# EAGLE board SchCompleto (EAGLE 9.6.2)
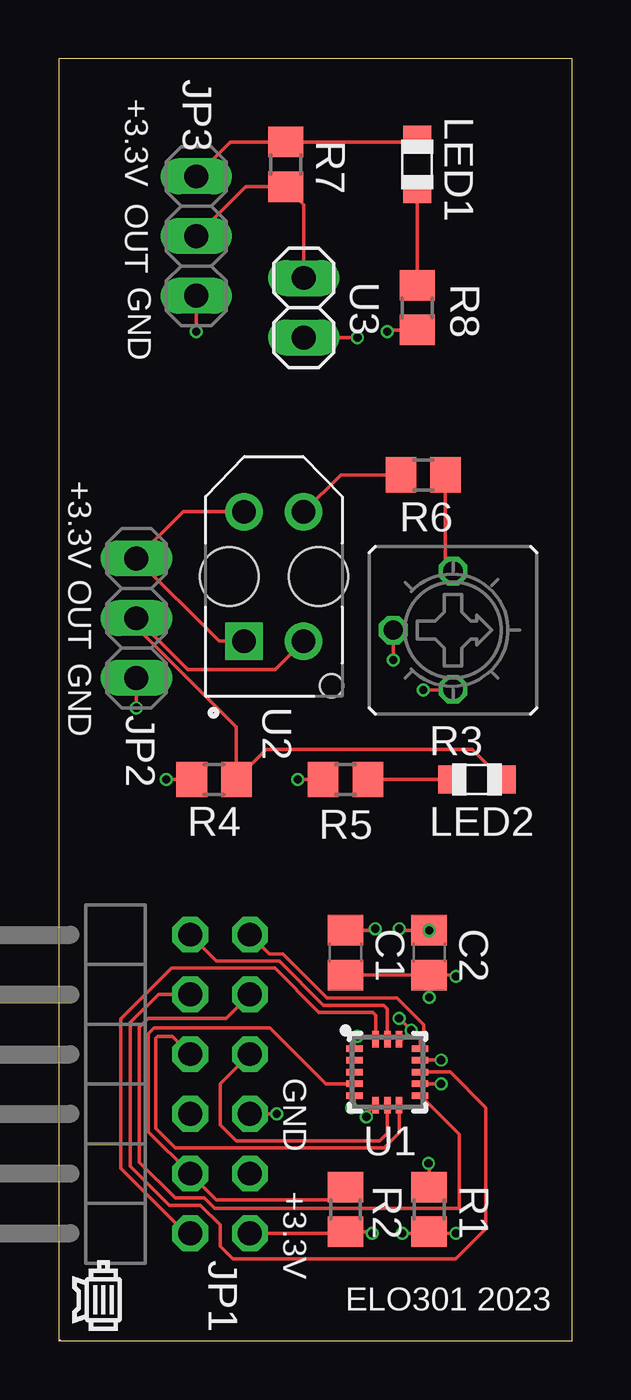
[diagram p0: board, top side]
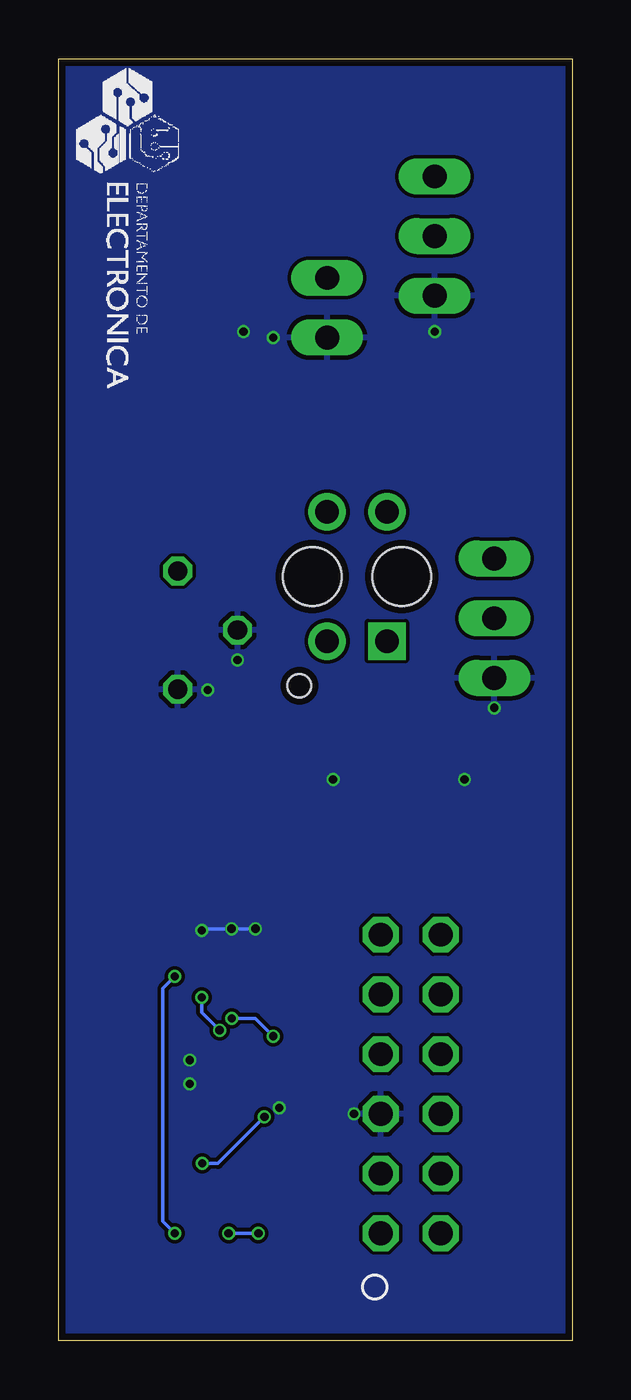
[diagram p1: board, bottom side, seen from below]

Size 21.82 x 54.53 mm. Coordinates in mm from the lower left corner, seen from the top.
Outline: 0,0 21.82,0 21.82,54.53 0,54.53 0,0
Copper layers (1*16): Top 0.035mm / dielectric 1.5mm / Bottom 0.035mm
Design rules "PCBWay_2L_152um-Track *": minimum track width 6mil, minimum drill 0.3mm, track to track 6mil, track to pad 6mil, pad to pad 6mil, via to via 6mil, smd to smd 0mil, copper to edge 0.3mm, drill to drill 10mil, minimum pad ring 6mil, minimum via ring 0.1mm, stop-mask expansion 2mil, vias tented up to drill 0.45mm, thermal gap 0.2mm

## Footprints (pad centres in the part's own frame; a part is rotated, then mirrored left to right if it is on the bottom)
C0805 = smd 1.3 x 1.5: 1 -0.95,0; 2 0.95,0
2X06/90 = drill 1.016 octagon: 1 -6.35,-6.35; 2 -6.35,-3.81; 3 -3.81,-6.35; 4 -3.81,-3.81; 5 -1.27,-6.35; 6 -1.27,-3.81; 7 1.27,-6.35; 8 1.27,-3.81; 9 3.81,-6.35; 10 3.81,-3.81; 11 6.35,-6.35; 12 6.35,-3.81
1X03 = drill 1.016 long: 1 -2.54,0; 2 0,0; 3 2.54,0
CHIP-LED0805 = smd 1.2 x 1.2: A 0,-1.05; C 0,1.05
R0805 = smd 1.3 x 1.5: 1 -0.95,0; 2 0.95,0
CT6 = drill 0.813 octagon: A 2.515,0; E -2.515,0; S 0,-2.54
LGA-16-3X3 = smd 0.7 x 0.28: 1 -1.4,1; 2 -1.4,0.5; 3 -1.4,0; 4 -1.4,-0.5; 5 -1.4,-1; 9 1.4,-1; 10 1.4,-0.5; 11 1.4,0; 12 1.4,0.5; 13 1.4,1 | smd 0.28 x 0.7: 6 -0.5,-1.4; 7 0,-1.4; 8 0.5,-1.4; 14 0.5,1.4; 15 0,1.4; 16 -0.5,1.4
PCBMOUNT = drill 1 pad 1.6 square: 1 -2.75,1.27 | drill 1 pad 1.6: 2 -2.75,-1.27; 3 2.75,-1.27; 4 2.75,1.27 | hole 2.5: 0,1.9; 0,-1.9 | hole 1: -4.65,-2.45
1X02 = drill 1.016 long: 1 -1.27,0; 2 1.27,0

## Placement (x,y rotation side)
C1  100nF  [C0805]  12.19,16.51 90 top
C2  10uF  [C0805]  15.75,16.51 90 top
JP1  [2X06/90]  1.78,10.92 90 top
JP2  [1X03]  3.3,30.73 90 top
JP3  [1X03]  5.84,46.99 90 top
LED1  [CHIP-LED0805]  15.24,50.04 180 top
LED2  [CHIP-LED0805]  17.78,23.88 90 top
R1  10k  [R0805]  15.75,5.59 270 top
R2  10k  [R0805]  12.19,5.59 270 top
R3  5kΩ  [CT6]  16.76,30.23 270 top
R4  3.3kΩ  [R0805]  6.6,23.88 0 top
R5  100Ω  [R0805]  12.19,23.88 0 top
R6  50Ω  [R0805]  15.49,36.83 180 top
R7  3.3kΩ  [R0805]  9.65,50.04 270 top
R8  100Ω  [R0805]  15.24,43.94 270 top
U1  LIS3DHTR  [LGA-16-3X3]  13.97,11.43 0 top
U2  TCRT5000L  [PCBMOUNT]  9.14,32.51 90 top
U3  SENSOR_TEMPERATURA  [1X02]  10.41,43.94 270 top

## Library data of the parts
C1 = rcl; PARTNO: GCM21BR72A104KA37L; SPICEPREFIX: C
C2 = rcl; PARTNO: EDK106M035A9BAA; SPICEPREFIX: C
JP1 = PPPC062LJBN-RC - Sullins Connector Solutions
JP2 JP3 = PPPC031LFBN-RC-Sullins; PARTNO: PPPC031LFBN-RC
LED1 LED2 = LED-EAST2012GA0; PARTNO: EAST2012GA0
R1 R2 = rcl; PARTNO: RC0805FR-0710KL; SPICEPREFIX: R
R3 = POTENCIOMETRO-CT-6EP502; PARTNO: CT-6EP502
R4 R7 = rcl; PARTNO: RC0402FR-073K3L; SPICEPREFIX: R
R5 R8 = rcl; PARTNO: RC0805FR-07100RL; SPICEPREFIX: R
R6 = rcl; PARTNO: RT0805FRE0751RL; SPICEPREFIX: R
U1 = LIS3DHTR-STM
U2 = TCRT5000L-Vishay; CHECK_PRICES: https://www.snapeda.com/parts/TCRT5000L/Vishay+Semiconductor+Opto+Division/view-part/?ref=eda; DESCRIPTION: Reflective Optical Sensor 0.591 (15mm) PCB Mount; MF: Vishay; MP: TCRT5000L; PACKAGE: PCB Mount Vishay Semiconductor; PURCHASE-URL: https://www.snapeda.com/api/url_track_click_mouser/?unipart_id=229608&manufacturer=Vishay&part_name=TCRT5000L&search_term=None; SNAPEDA_LINK: https://www.snapeda.com/parts/TCRT5000L/Vishay+Semiconductor+Opto+Division/view-part/?ref=snap
U3 = NTCLE305E4103SB - Vishay; PARTNO: NTCLE305E4103SB

## Nets
+3V3: C1.1 C2.1 JP1.1 R1.2 R2.2 U1.1 U1.14
ADC1: JP1.2 U1.16
ADC2: JP1.12 U1.15
ADC3: JP1.11 U1.13
CS: JP1.8 U1.8
GND: C1.2 C2.2 JP1.5 JP2.1 JP3.1 R3.A R3.S R4.1 R5.1 R8.2 U1.5 U1.10 U1.12 U3.2
INT1: JP1.10 U1.11
INT2: JP1.9 U1.9
LED1_R8: LED1.C R8.1
OUT2: JP2.2 LED2.A R4.2 U2.2
OUT3: JP3.2 R7.2 U3.1
R3_R6: R3.E R6.1
R5_LED2: LED2.C R5.2
R6_TCRT: R6.2 U2.3
SCL/SPC: JP1.4 R2.1 U1.4
SDA/SDI/SDO: R1.1 U1.6
SDO/SA0: JP1.7 U1.7
VCC: JP2.3 U2.1 U2.4
VDD: JP3.3 LED1.A R7.1

## Tracks (layer width: path | path; a pad name or v marks a point on that pad's centre or on a via)
+3V3  (via drill 0.35)
  Top 0.152: C2.1 C1.1 | JP1.1 12.13,4.57 R2.2 13.27,4.64 v13.34,4.57 | U1.1 12.57,12.82 v12.7,12.95 | U1.14 14.6,12.83 14.97,13.21 v14.99,13.21 14.98,13.21 v14.47,13.72 | v15.75,14.61 C2.1 | v14.61,4.57 15.68,4.57 R1.2 15.81,4.57 v16.89,4.57 | v16.89,15.49 16.82,15.56 C2.1 | C2.1
  Bottom 0.152: v12.7,12.95 13.46,13.72 v14.47,13.72 | v14.99,13.21 15.75,13.97 v15.75,14.61 | v13.34,4.57 v14.61,4.57 | v16.89,4.57 17.4,5.08 17.4,14.99 v16.89,15.49
ADC1
  Top 0.152: U1.16 13.47,13.84 13.34,13.97 11.06,13.97 9.17,15.85 4.8,15.85 2.64,13.7 2.64,7.34 5.41,4.57 JP1.2
ADC2
  Top 0.152: U1.15 13.97,14.11 13.81,14.27 11.26,14.27 9.37,16.15 6.7,16.15 JP1.12
ADC3
  Top 0.152: U1.13 15.37,12.76 15.52,12.9 15.52,13.44 14.38,14.58 11.4,14.58 9.52,16.46 8.94,16.46 JP1.11
CS
  Top 0.152: JP1.8 4.83,12.95 4.22,12.95 4.12,12.85 4.12,9.04 4.96,8.2 13.83,8.2 14.47,8.84 U1.8
GND  (via drill 0.35)
  Top 0.152: C1.2 13.4,17.46 v13.46,17.53 | C2.2 14.54,17.46 v14.48,17.53 | U1.5 12.57,10.03 v12.45,9.91 | U1.12 v16.26,11.94 | U1.10 16.25,10.93 v16.26,10.92 | JP1.5 v9.27,9.65 | R3.S v14.22,28.96 | R5.1 v10.16,23.88 | R4.1 v4.57,23.88 | R3.A 16.74,27.69 v15.49,27.69 | JP2.1 v3.3,26.92 | R8.2 14.04,42.99 v13.97,42.93 | U3.2 v12.7,42.67 | JP3.1 v5.84,42.93
  Bottom 0.152: v13.46,17.53 v14.48,17.53 15.68,17.53 C2.2
  other vias: 15.75,17.46
  pour Bottom: 0,54.61 21.84,54.61 21.84,0 0,0
INT1
  Top 0.152: JP1.10 4.24,14.73 3.05,13.54 3.05,7.42 4.7,5.77 6.02,5.77 6.86,4.93 6.86,4.01 7.39,3.48 16.89,3.48 18.16,4.75 18.16,9.91 16.64,11.43 U1.11
INT2
  Top 0.152: JP1.9 7.11,13.72 3.81,13.72 3.43,13.34 3.43,7.59 4.95,6.07 6.19,6.07 6.63,5.64 17.02,5.64 17.02,8.78 U1.9
LED1_R8
  Top 0.152: R8.1 LED1.C
OUT2
  Top 0.152: U2.2 9.2,28.56 5.48,28.56 JP2.2 3.3,30.36 7.54,26.11 R4.2 8.82,25.15 17.58,25.15 LED2.A
OUT3
  Top 0.152: U3.1 10.41,48.33 R7.2 7.94,49.09 JP3.2
R3_R6
  Top 0.152: R3.E 16.44,33.06 R6.1
R5_LED2
  Top 0.152: R5.2 LED2.C
R6_TCRT
  Top 0.152: U2.3 11.98,36.83 R6.2
SCL/SPC
  Top 0.152: R2.1 11.65,5.99 6.7,5.99 JP1.4 3.81,8.89 3.81,13.06 4.06,13.31 8.97,13.31 11.35,10.93 U1.4
SDA/SDI/SDO  (via drill 0.35)
  Top 0.152: U1.6 13.08,9.64 v13.08,9.53 | v15.72,7.54 15.75,7.52 R1.1
  Bottom 0.152: v13.08,9.53 15.06,7.54 v15.72,7.54
SDO/SA0
  Top 0.152: JP1.7 6.86,10.92 6.86,9.19 7.55,8.5 13.65,8.5 13.97,8.82 U1.7
VCC
  Top 0.152: U2.4 5.29,35.26 JP2.3 6.81,29.76 U2.1
VDD
  Top 0.152: JP3.3 7.3,50.99 R7.1 15.14,50.99 LED1.A

## Text on the board
tPlace: +3.3V | OUT | GND | +3.3V | OUT | GND | GND | +3.3V | ELO301 2023